# Altium PCB Receiver_1_5.PcbDoc
Units mm, origin at the board's own origin, x right, y up, seen from the top; angles counter-clockwise.
Board outline 173.49 x 80.89 mm, 2 copper layers (Top Layer, Bottom Layer), stack 1.571 mm thick; 36 components, 24 nets, 139 pads, 292 vias.
Unrouted connection lines stored in the file: 23.
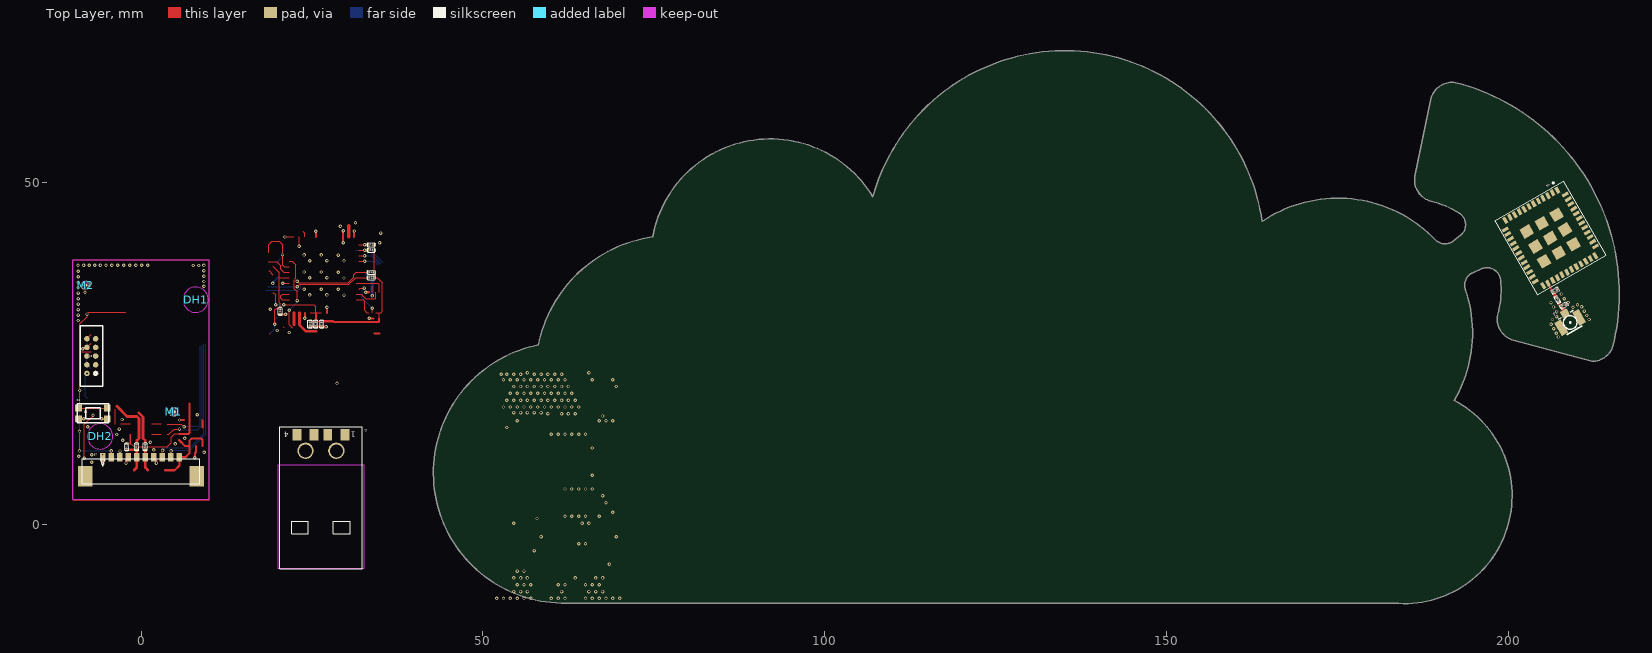
[diagram p0: Top Layer view]
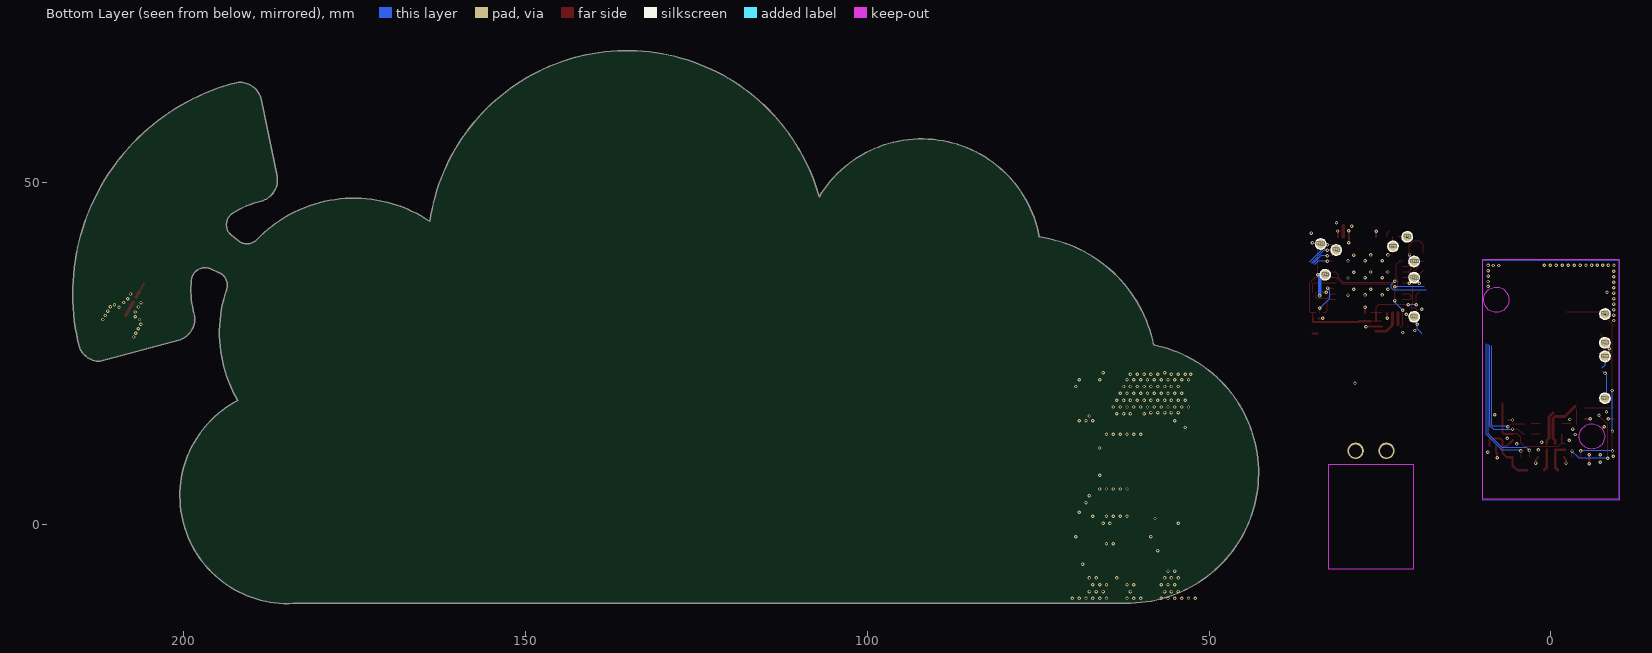
[diagram p1: Bottom Layer view, seen from below]

## Layer stack, top to bottom
Top Solder: solder mask 0.0102, Solder Resist, Dk 3.5
Top Layer: signal copper 0.0356
Dielectric 1: core 1.5, 2116, Dk 4.2
Bottom Layer: signal copper 0.0356
Bottom Solder: solder mask 0.0102, Solder Resist, Dk 3.5

## Board outline
61.459,-11.48 cw(c61.841,7.581) 58.129,26.281 cw(c77.684,22.342) 74.837,42.085 cw(c92.065,38.908) 107.067,47.956 cw(c135.164,40.182) 164.019,44.343 cw(c175.1,28.056) 189.321,41.687 ccw(c190.765,43.071) 192.01,41.505 193.025,42.313 ccw(c191.78,43.878) 192.859,45.563 ccw(c185.699,34.382) 188.717,47.311 cw(c189.537,50.437) 186.342,50.918 188.697,62.236 cw(c191.811,61.5) 192.298,64.663 cw(c184.432,33.81) 215.271,25.886 cw(c212.274,27.128) 212.274,23.884 200.776,26.984 cw(c201.626,30.099) 198.45,30.684 ccw(c185.699,34.382) 198.9,35.797 ccw(c196.911,35.584) 196.098,37.41 194.836,36.849 ccw(c195.65,35.022) 193.756,34.38 cw(c175.1,28.056) 192.128,18.153 cw(c184.83,4.192) 183.318,-11.489

## Design rules (kind name [scope] priority, off if disabled: settings)
BoardOutlineClearance [All] p1: gap=0.5 ignorepadtopadclearanceinfootprint=FALSE
Clearance Clearance_Fidu [IsPad AND (InComponent('M1') OR InComponent('M2')) vs IsArc] p1: gap=0.04 ignorepadtopadclearanceinfootprint=FALSE
Clearance Clearance_Polygon [InNamedPolygon('Top-GND') vs not (istrack and OnLayer('Keep-Out Layer'))] p2: gap=0.254 ignorepadtopadclearanceinfootprint=FALSE except(0: Arc-Hole Track-Hole SMDPad-Hole THPad-Hole Via-Hole Fill-Hole Poly-Hole Region-Hole Text-Hole)
Clearance Clearance_RF [All] p3: gap=0.125 ignorepadtopadclearanceinfootprint=FALSE
Clearance [All] p4: gap=0.125 ignorepadtopadclearanceinfootprint=FALSE
ComponentClearance [All] p1 off: gap=0.254 collisioncheckmode=3 verticalgap=0.254 showdistances=FALSE
DiffPairsRouting [All] p1: maxlimit=0.254 minlimit=0.165 mostfreqgap=0.165 toplayer_minwidth=0.4 toplayer_maxwidth=0.5 toplayer_prefwidth=0.5 bottomlayer_minwidth=0.4 bottomlayer_maxwidth=0.5 bottomlayer_prefwidth=0.5 maxuncoupledlength=12.7
Height [All] p1: minheight=0 maxheight=50 prefheight=12.7
HoleSize [All] p1: absolutevalues=TRUE maxlimit=5 minlimit=0.25 maxpercent=80.000 minpercent=20.000
HoleToHoleClearance [All] p1: gap=0.2 allowstackedmicrovias=TRUE
MinimumSolderMaskSliver [All] p1 off: minsoldermaskwidth=0.1
PolygonConnect Polygon_Via [isvia] p1: connectstyle=Direct reliefconductorwidth=0.254 reliefentries=4 polygonreliefangle="90 Angle" airgapwidth=0.254
PolygonConnect [All] p2: connectstyle=Direct reliefconductorwidth=0.254 reliefentries=4 polygonreliefangle="90 Angle" airgapwidth=0.254
RoutingVias [All] p1: holewidth=0.25 width=0.5 viastyle="Through Hole" minholewidth=0.25 minwidth=0.5 maxholewidth=0.8 maxwidth=1
SilkToSilkClearance [All] p1 off: silktosilkclearance=0.254
SilkToSolderMaskClearance SilkscreenOverComponentPads [IsPad] p1 off: minsilkscreentomaskgap=0.254 clearancetoexposedcopper=TRUE
SolderMaskExpansion [All] p1: expansion=0.1
Width Width_RF [InNetClass('RF')] p1: maxlimit=0.5 minlimit=0.2 preferedwidth=0.2 bottomlayer_maxwidth=0.2 minimp=50.000000 maximp=50.000000 favimp=50.000000
Width [All] p2: maxlimit=5 minlimit=0.125 preferedwidth=0.125 minimp=50.000000 maximp=50.000000 favimp=50.000000
22 further rules are at their usual default settings.

## Classes and differential pairs
net class RF: ANT NetC11_1
differential pair USB: +USB_P -USB_N
differential pair USB_R: +USB_R_P -USB_R_N

## Components (designator, comment, footprint, x,y, rotation, side; value= is the part's Value field where it differs from the comment)
C7 "10u" CAPC0402(1005)60_L 24.725,29.35 r90 top
C8 "1u" CAPC0402(1005)60_L 26.425,29.35 r90 top
C9 "100n" CAPC0402(1005)60_L 25.575,29.35 r90 top
C10 "" CAPC0402(1005)60_L 206.856,34.226 r30 top
C11 "" CAPC0402(1005)60_L 208.14,32.052 r30 top
DH1 "Drill hole M2.5_nonplated" "Drill hole M2.5_nonplated" 8,32.9 r0 top locked
DH2 "Drill hole M2.5_nonplated" "Drill hole M2.5_nonplated" -6,12.9 r0 top
J1 "629004113921" 629004113921 26.325,-6.45 r180 top
J2 "TC2050-IDC" TC2050-IDC-NL-10 -7.275,24.65 r90 top locked
J3 "0533981071" 0533981071 0,9.85 r0 top locked
J4 "U.FL-R-SMT-1" U.FL 209.084,29.566 r210 top
L1 "0R" L_0402_HF 207.181,32.913 r120 top
M1 "Fiducial Round" "Fiducial round_small" 4.8,16.5 r0 top
M2 "Fiducial Round" "Fiducial round_small" -8.075,35 r0 top
R2 "100k" RESC0402(1005)_L 33.675,40.929 r180 top
R3 "100k" RESC0402(1005)_L 33.675,40.129 r180 top
R4 "10k" RESC0402(1005)_L 20.375,31.2 r270 top
R8 "0R" RESC0402(1005)_L 0.625,11.4 r270 top
R9 "0R" RESC0402(1005)_L -0.625,11.4 r270 top
R11 "100k" RESC0402(1005)_L 33.675,36.925 r180 top
R12 "100k" RESC0402(1005)_L 33.675,36.125 r180 top
R13 "1k5" RESC0402(1005)_L -2.1,11.4 r270 top
S1 "KMR211GLFS" KMR211GLFS -7.05,16.275 r0 top
TP1 "Testpoint 1.5mm" "Testpoint SMD 1.5mm"#1 31.425,40.175 r180 bottom
TP2 "Testpoint 1.5mm" "Testpoint SMD 1.5mm"#2 21.025,42.1 r180 bottom
TP3 "Testpoint 1.5mm" "Testpoint SMD 1.5mm"#2 23.125,40.7 r180 bottom
TP4 "Testpoint 1.5mm" "Testpoint SMD 1.5mm"#2 33.025,36.55 r180 bottom
TP5 "Testpoint 1.5mm" "Testpoint SMD 1.5mm"#2 -7.9,30.8 r180 bottom
TP6 "Testpoint 1.5mm" "Testpoint SMD 1.5mm"#2 20.025,30.4 r180 bottom
TP7 "Testpoint 1.5mm" "Testpoint SMD 1.5mm"#2 -7.9,18.5 r180 bottom
TP8 "Testpoint 1.5mm" "Testpoint SMD 1.5mm"#2 -7.9,24.6 r180 bottom
TP9 "Testpoint 1.5mm" "Testpoint SMD 1.5mm"#2 -7.9,26.6 r180 bottom
TP10 "Testpoint 1.5mm" "Testpoint SMD 1.5mm"#2 20.025,38.5 r180 bottom
TP11 "Testpoint 1.5mm" "Testpoint SMD 1.5mm"#2 20.025,36.125 r180 bottom
TP12 "Testpoint 1.5mm" "Testpoint SMD 1.5mm"#2 33.7,41.05 r180 bottom
U6 "CMWX1ZZABZ-078" CMWX1ZZABZ 207.203,48.938 r300 top

## Footprints (in the part's own frame and the unit in brackets; to place one, negate y for a bottom-side part, rotate by r counter-clockwise, add the part's x,y. Pads: shape width x height; smd on the part's side, far side on the other; paste and mask are expansions set on the pad)
0533981071 [mm] "CONN HEADER 10POS 1.25MM VRT SMD"
  rect 2.1x3 smd: 0(-8.175,-2.75) 0(8.175,-2.75)
  rect 0.8x1.3 smd: 1(-5.625,0) 2(-4.375,0) 3(-3.125,0) 4(-1.875,0) 5(-0.625,0) 6(0.625,0) 7(1.875,0) 8(3.125,0) 9(4.375,0) 10(5.625,0)
  silkscreen extent -8.62,-3.9 8.62,-0.2, body extent -8.82,-3.85 8.82,0.35, height 4.71
629004113921 [mm] "4 pins"
  rect 1.3x1.7 smd: 1(-3.5,-19.6) 2(-1,-19.6) 3(1,-19.6) 4(3.5,-19.6)
  round 2.4 hole 1.9: Z1(-2.25,-17.25) Z2(2.25,-17.25)
  Keep-Out Layer board cut-out: -6.225,0 6.225,0 6.225,-15.2 -6.225,-15.2
  BoardOutline keep-out lines w0.127: 6.225,0 6.225,-15.2 -6.225,-15.2 -6.225,0 6.225,0
  silkscreen extent -6.02,-20.75 6.03,0, body extent -6.02,-19.8 6.03,0, height 1.86
CAPC0402(1005)60_L [mm] "Chip Capacitor, Body 1.0x0.5mm, Height 0.6mm, IPC High Density"
  rect 0.52x0.52 smd: 1(-0.4,0) 2(0.4,0)
  silkscreen extent -0.55,-0.3 0.55,0.3, body extent -0.55,-0.3 0.55,0.3, height 0.6
CMWX1ZZABZ [mm] "LoRa Module"
  rect 1x0.5 smd: 1(0,0) 2(0,-0.8) 3(0,-1.6) 4(0,-2.4) 5(0,-3.2) 6(0,-4) 7(0,-4.8) 8(0,-5.6) 9(0,-6.4) 10(0,-7.2) 11(0,-8) 12(0,-8.8) 25(11.1,-8.8) 26(11.1,-8) 27(11.1,-7.2) 28(11.1,-6.4) 29(11.1,-5.6) 30(11.1,-4.8) 31(11.1,-4) 32(11.1,-3.2) 33(11.1,-2.4) 34(11.1,-1.6) 35(11.1,-0.8) 36(11.1,0)
  rect 0.5x1 smd: 13(1.15,-9.5) 14(1.95,-9.5) 15(2.75,-9.5) 16(3.55,-9.5) 17(4.35,-9.5) 18(5.15,-9.5) 19(5.95,-9.5) 20(6.75,-9.5) 21(7.55,-9.5) 22(8.35,-9.5) 23(9.15,-9.5) 24(9.95,-9.5) 37(9.95,0.7) 38(9.15,0.7) 39(8.35,0.7) 40(7.55,0.7) 41(6.75,0.7) 42(5.95,0.7) 43(5.15,0.7) 44(4.35,0.7) 45(3.55,0.7) 46(2.75,0.7) 47(1.95,0.7) 48(1.15,0.7)
  rrect20% 1.6x1.6 smd: 49(3.05,-1.9)
  rect 1.6x1.6 smd: 50(5.55,-1.9) 51(8.05,-1.9) 52(3.05,-4.4) 53(5.55,-4.4) 54(8.05,-4.4) 55(3.025,-6.9) 56(5.55,-6.9) 57(8.05,-6.9)
  silkscreen extent -1.3,-10.2 11.8,1.4, body extent -0.7,-10.2 11.8,1.4, height 1.76
"Drill hole M2.5_nonplated" [mm] "Drill hole M2.5_nonplated"
  round 0 hole 2.7 unplated: 0(0,0)
  Keep-Out Layer circle w0.1: c0,0 r1.85
"Fiducial round_small" [mm] "0.5mm round fiducial"
  round 0.5 smd paste-1 mask+0.25: 0(0,0)
  Top Layer keep-out circle w0.1: c0,0 r0.35
  silkscreen extent -0.6,-0.6 0.6,0.6
KMR211GLFS [mm] "Microminiature SMT Top Actuated"
  rect 1x1 smd: 1(-2.1,0.8) 2(2.1,0.8) 3(-2.1,-0.8) 4(2.1,-0.8)
  silkscreen extent -2.3,-1.4 2.3,1.4, body extent -2.3,-1.4 2.3,1.4, height 1.9
L_0402_HF [mm] "Serie_LQW"
  rect 0.52x0.6 smd: 1(-0.4,0) 2(0.4,0)
  silkscreen extent -0.55,-0.25 0.55,0.25, body extent -0.55,-0.3 0.55,0.3, height 0.6
RESC0402(1005)_L [mm] "Chip Resistor, Body 1.0x0.5mm, IPC High Density"
  rect 0.45x0.55 smd: 1(-0.45,0) 2(0.45,0)
  silkscreen extent -0.53,-0.27 0.53,0.28, body extent -0.52,-0.27 0.53,0.28, height 0.4
TC2050-IDC-NL-10 [mm] "Tag Connect 2050 IDC, 10 Pins, no legs"
  round 0 hole 1 unplated: 0(-3.81,0) 0(3.81,-1.016) 0(3.81,1.016)
  round 0.8 smd paste-0.8: 1(-2.54,-0.635) 2(-1.27,-0.635) 3(0,-0.635) 4(1.265,-0.635) 5(2.535,-0.635) 6(2.535,0.635) 7(1.265,0.635) 8(0,0.635) 9(-1.27,0.635) 10(-2.54,0.635)
  silkscreen extent -4.44,-1.65 4.46,1.65, body extent -6.22,-3.37 6.22,3.37, height 29.28
"Testpoint SMD 1.5mm"#1 [mm] "SMD Testpoint, 1.5mm round"
  round 1.5 smd paste-1: 1(0,-0.075)
  silkscreen extent -0.75,-0.75 0.75,0.75
"Testpoint SMD 1.5mm"#2 [mm] "SMD Testpoint, 1.5mm round"
  round 1.5 smd paste-1: 1(0,0)
  silkscreen extent -0.75,-0.75 0.75,0.75
U.FL [mm] "U.FL Footprint designed for Hirose U.FL-R-SMT-1"
  rrect20% 1.1x1.1 smd: 1(0,-1.55)
  rrect20% 1.1x2.25 smd: 2(1.5,0) 3(-1.5,0)
  silkscreen extent -1.3,-1.3 1.3,1.3, body extent -1.3,-1.3 1.3,1.3, height 1.25

## Part data
C7 C8 C9: library part C_Chip_03, "Chip Capacitor", Properties="5%, 50V, X7R", SchLibComponentName=C_Chip
C10 C11: library part C_Chip-03, "Chip Capacitor", Manufacturer="Murata Electronics North America", Temperature Coefficient="C0G, NP0", Tolerance=±0.1pF, Voltage - Rated=50V, ComponentLink1Description=Datasheet, Supplier 1=Digi-Key
  C10: ComponentLink1URL=http://www.murata.com/~/media/webrenewal/support/library/catalog/products/capacitor/mlcc/c02e.ashx
  C11: Properties="50V, NPO"
DH1 DH2: library part "Drill hole M2.5_nonplated-01"
J1: library part 629004113921-01, "WR-COM USB Type A SMT with Clip", Manufacturer="Wurth Electronics Inc", Supplier Part Number 1=732-3182-5-ND, Category="Connectors, Interconnects", ComponentLink1Description=Datasheet, ComponentLink1URL=http://katalog.we-online.de/em/datasheet/629004113921.pdf, Connector Type="USB - A", Features="Board Lock, Shielded", Gender=Plug, Ingress Protection=-, Manufacturer Part Number=629004113921, Mounting Type="Surface Mount, Right Angle, Horizontal", Number of Contacts=4, Packaging=Tube, Pricing 1="1=2.25, 10=1.95, 50=1.8376, 100=1.65, 500=1.5 (USD)", RoHS="RoHS Compliant", SchLibComponentName=629004113921, Specifications=-, Stock 1=415, Supplier 1=Digi-Key, Supplier 2=Farnell, Supplier 3=Mouser, Supplier Part Number 2=2442732, Supplier Part Number 3=710-629004113921
J2: library part TDC2050-IDC-01, "TDC2050-IDC, 10Pins, dual footprint (leg and no-legs)", Manufacturer=Tag-Connect, ComponentLink1Description=Datasheet, ComponentLink1URL=http://www.tag-connect.com/Materials/TC2050-IDC%20Datasheet.pdf, Manufacturer Part Number=TC2050-IDC, SchLibComponentName=TC2050-IDC
J3: library part 0533981071-01, "CONN HEADER 10POS 1.25MM VRT SMD", Color=Natural, Manufacturer="Molex, LLC", Supplier Part Number 1=WM7614CT-ND, Category="Connectors, Interconnects", ComponentLink1Description=Datasheet, ComponentLink1URL=http://www.molex.com/pdm_docs/sd/533981071_sd.pdf, Connector Type="Header, Shrouded", Contact Finish=Tin, Contact Finish Thickness="39µin (1.00µm)", Contact Mating Length=-, Contact Type="Male Blade", Fastening Type="Detent Lock", Features="Solder Retention", Manufacturer Part Number=0533981071, Mounting Type="Surface Mount", Number of Positions=10, Number of Positions Loaded=All, Number of Rows=1, Packaging="Cut Tape (CT)", Part Status=Active, Pitch="0.049\" (1.25mm)", Pricing 1="1=1.74, 10=1.582, 25=1.4848, 50=1.4202, 100=1.3557, 250=1.22664, 500=1.12978 (USD)", RoHS="RoHS Compliant", Row Spacing=-, SchLibComponentName=0533981071, Stock 1=7748, Supplier 1=Digi-Key, Termination=Solder
J4: library part "COAX - U.FL-R-SMT-1", "Ultra Small Surface Mount Coaxial Connectors", Frequency - Max=6GHz, Manufacturer="Hirose Electric Co Ltd", Placetec Part Number=182-916100000000, Supplier Part Number 1=H11891CT-ND, Category="Connectors, Interconnects", ComponentLink1Description=http://www.hirose.co.jp/cataloge_hp/e32119372.pdf, ComponentLink1URL=http://www.hirose.co.jp/cataloge_hp/e32119372.pdf, Connector Style="Ultra Miniature Coaxial", Connector Type="Receptacle, Male Pins", Contact Termination=Solder, Fastening Type=Snap-On, Impedance="50 Ohm", Manufacturer Part Number=U.FL-R-SMT-1, Mounting Type="Surface Mount", Packaging="Cut Tape (CT)", RoHS="RoHS Compliant", Supplier 1=Digi-Key
L1: library part L_Chip_0402_HF-01, "Chip Inductor", Tolerance=±1%, Supplier 1=Digi-Key
M1 M2: library part "Fiducial Round-04", "Fiducial (Optical Marker)"
R2 R3 R4 R8 R9 R11 R12: library part R_Chip-05, "Chip Resistor", Properties=1%, SchLibComponentName=R_Chip
R13: library part R_Chip-02, "Chip Resistor", Properties=1%
S1: library part KMR211GLFS-01, "SWITCH TACTILE SPST-NO 0.05A 32V", Contact Rating @ Voltage="0.05A @ 32VDC", Illumination Type, Color=-, Manufacturer="C&K Components", Operating Force=120gf, Operating Temperature="-40°C ~ 85°C", Supplier Part Number 1=401-1426-1-ND, Actuator Height off PCB, from Pins=1.90mm, Actuator Material=-, Actuator Orientation="Top Actuated", Actuator Type=Standard, Category=Switches, Circuit=SPST-NO, ComponentLink1Description=http://www.ck-components.com/index.php?module=media&action=Display&cmpref=14414&lang=en&width=&height=&format=&alt=, ComponentLink1URL=http://www.ck-components.com/index.php?module=media&action=Display&cmpref=14414&lang=en&width=&height=&format=&alt=, Features="Grounding Pin", Illumination=Non-Illuminated, Illumination Voltage (Nominal)=-, Ingress Protection=-, Manufacturer Part Number=KMR211GLFS, Mechanical Life="200,000 Cycles", Mounting Type="Surface Mount", Outline="4.60mm x 2.80mm", Packaging="Cut Tape (CT)", Pricing 1="1=0.51, 10=0.493, 25=0.484, 50=0.4656, 100=0.4017, 250=0.3652, 500=0.34694, 1000=0.2739 (USD)", RoHS="RoHS Compliant", SchLibComponentName=KMR211GLFS, Stock 1=31963, Supplier 1=Digi-Key, Switch Function=Off-Mom, Switch Travel=0.20mm, Termination Style="Gull Wing"
TP1 TP2 TP3 TP4 TP5 TP6 TP7 TP8 TP9 TP10 TP11 TP12: library part "Testpoint SMD 1.5mm-02", "Testpoint SMD 1.5mm", SchLibComponentName="Testpoint 1.5mm"
U6: "LORA MODULE", Manufacturer="Murata Electronics North America", Supplier Part Number 1=490-16143-1-ND, ComponentLink1Description=Datasheet, ComponentLink1URL=http://wireless.murata.com/RFM/data/type_abz.pdf, Manufacturer Part Number=CMWX1ZZABZ-078, Supplier 1=Digikey

## Via types
v1: diameter 0.5, hole 0.25, Top Layer to Bottom Layer, tented both sides, 292 vias

## Nets (pads, with @x,y where several pads share a name; then routed paths per layer and width w, separated by ;. In a path a pad name is that pad's centre, name@x,y a point inside that pad or via, vN(x,y) a via of type N, cw(c..) or ccw(c..) an arc to the next point about the centre after c; other vN are vias at no path point)
\NRESET: J2.3 J3.2 S1.1 S1.2 TP5.1 U6.34 | length 42.3
  Top Layer w0.125: v1(-9,10.775) -9,13.603 v1@-8.978,13.625 ; -7.265,25.275 -8.95,25.275 -8.978,25.303 ; S1.2@-5.038,16.987 -9.062,16.987 S1.1 -8.978,17.247 v1(-8.978,19.622) -8.978,25.303 ; J3.2 v1(-4.375,10.775) ; -2.25,31.05 -7.65,31.05 v1(-7.9,30.8) -7.9,30.439 -8.978,29.361 -8.978,25.303 ; 18.66,37.175 19.285,36.55 ; 20.887,28.887 20.975,28.975 ; 23.675,42.95 23.975,42.65 23.975,42.075
  Bottom Layer w0.125: v1(-9,10.775) v1(-4.375,10.775) ; v1(-9,13.625) -8.978,13.647 v1(-8.978,19.622)
ANT: C10.1 L1.2 U6.26 | length 4
  Top Layer w0.2: U6.26 206.548,34.048 C10.1@206.561,34.025
  Top Layer w0.5: 30.375,42.075 30.375,43.7 ; C10.1@206.543,34.017 L1.2
BOOT: J2.4 J3.3 R4.1 TP6.1 U6.43 | length 27.4
  Top Layer w0.125: v1(-8.3,9.7) -8.3,14.675 v1@-7.025,15.95 ; J3.3 -3.075,9.9 v1(-3.075,10.75) ; 18.9,27.85 18.9,27.9 ; 19.285,37.815 20.225,36.875 20.225,36.1 ; v1(19.575,29.325) 19.575,31.4 19.825,31.65 R4.1 20.375,32.275 20.225,32.425 20.225,36.1 ; 21.675,36.125 20.25,36.125 20.225,36.1
  Bottom Layer w0.125: v1(-8.3,9.7) -4.125,9.7 v1(-3.075,10.75) ; 18.9,27.9 18.9,27.969 19.575,28.644 v1(19.575,29.325) 19.575,29.95 TP6.1
  other v1: -7.025,16
CSS: U6.17
DBG_RX: J2.9 R12.2 TP8.1 U6.18 | length 17.2
  Top Layer w0.125: v1@22.675,34.775 22.875,34.775 23.25,35.15 30.404,35.15 31.379,36.125 31.875,36.125 R12.2
  Bottom Layer w0.125: TP8.1 -7.91,24.59 -7.91,23.38 -7.405,22.875 ; 18.52,34.775 v1@22.675,34.775
  other v1: 28.675,20.65 22.85,34.775
DBG_TX: J2.10 R11.2 TP7.1 U6.19 | length 21.9
  Top Layer w0.125: v1(22.825,35.6) 23.025,35.4 30.3,35.4 31.112,36.213 31.112,36.541 31.496,36.925 31.875,36.925 R11.2
  Bottom Layer w0.125: TP7.1 -8.15,18.75 -8.15,21.87 v1(-7.91,22.11) -7.645,22.375 ; 18.28,34.275 23,34.275 23.35,34.625 23.35,35.075 v1(22.825,35.6)
GND: C7.1 C8.1 C9.1 C10.2 C11.2 J1.4 J1.Z1 J1.Z2 J2.2 J3.1 J3.4 J3.7 J4.2 J4.3 R4.2 S1.3 S1.4 TP11.1 U6.3 U6.7 U6.25 U6.27 U6.32 U6.44 U6.49 U6.50 U6.51 U6.52 U6.53 U6.54 U6.55 U6.56 U6.57 | length 15.6
  Top Layer w0.125: v1(20.725,35.3) 20.75,35.325 21.675,35.325
  Top Layer w0.3: S1.3 v1(-8.375,15.475) ; v1(-5.75,15.475) S1.4 ; J3.1 -5.6,9.825 v1(-5.6,8.9) ; v1(-2.2,9) -2.2,9.525 J3.4 ; J3.7 2.25,9.475 v1(2.25,9) ; R4.2 21.15,30.75 v1(21.175,30.775) ; v1@23.975,30.2 23.975,30.975 ; C7.1 C9.1 C8.1 v1@27.075,28.95 ; 25.575,42.075 v1(25.575,42.9) ; 27.175,30.975 v1@27.175,31.775 ; v1(29.575,41.25) 29.575,42.075 v1(29.575,42.975) ; 31.175,42.075 v1(31.175,42.95) ; 34.15,27.95 34.9,27.95
  Bottom Layer w0.3: v1(19.285,35.28) 19.285,35.385 TP11.1 ; v1(29.575,42.975) cw(c29.6,42.975) v1@29.6,43
  other v1: 52.025,-10.8 53.025,-10.8 54.025,-10.8 55.025,-10.8 56.025,-10.8 57.025,-10.8 60.025,-10.8 61.025,-10.8 62.025,-10.8 65.025,-10.8 66.025,-10.8 67.025,-10.8 68.025,-10.8 69.025,-10.8 70.025,-10.8 54.525,-9.8 55.525,-9.8 56.525,-9.8 61.525,-9.8 65.525,-9.8 66.525,-9.8 67.525,-9.8 55.025,-8.8 56.025,-8.8 57.025,-8.8 61.025,-8.8 62.025,-8.8 65.025,-8.8 66.025,-8.8 67.025,-8.8 54.525,-7.8 55.525,-7.8 56.525,-7.8 63.525,-7.8 66.525,-7.8 67.525,-7.8 55.025,-6.8 56.025,-6.8 68.525,-5.8 57.525,-3.8 64.025,-2.8 65.025,-2.8 58.525,-1.8 69.525,-1.8 54.525,0.2 64.525,0.2 65.525,0.2 57.925,0.888 62.025,1.2 63.025,1.2 64.025,1.2 65.025,1.2 67.025,1.2 69.025,1.813 68.025,3.2 67.525,4.2 62.025,5.2 63.025,5.2 64.025,5.2 65.025,5.2 66.025,5.2 66.025,7.2 -7.2,9.1 -9.1,10 -7.2,10.2 -5.6,10.2 9.225,10.6 1.85,10.925 66.025,11.2 5,11.8 1.375,12.05 -2.675,12.35 6.4,12.6 -3.534,13.175 60.025,13.2 61.025,13.2 62.025,13.2 63.025,13.2 64.025,13.2 65.025,13.2 -3.2,13.975 53.525,14.2 -7.8,14.3 55.025,15.2 67.025,15.2 68.025,15.2 69.025,15.2 -2.775,15.375 67.525,15.888 8.225,16.05 59.525,16.2 61.525,16.2 62.525,16.2 63.525,16.2 54.525,16.388 55.525,16.388 56.525,16.388 57.525,16.388 58.525,16.388 -8.125,16.5 53.025,17.2 54.025,17.2 55.025,17.2 56.025,17.2 57.025,17.2 58.025,17.2 59.025,17.2 60.025,17.2 61.025,17.2 62.025,17.2 63.025,17.2 64.025,17.2 53.525,18.2 54.525,18.2 55.525,18.2 56.525,18.2 57.525,18.2 58.525,18.2 59.525,18.2 60.525,18.2 61.525,18.2 62.525,18.2 63.525,18.2 54.025,19.2 55.025,19.2 56.025,19.2 57.025,19.2 58.025,19.2 59.025,19.2 60.025,19.2 61.025,19.2 62.025,19.2 63.025,19.2 54.525,20.2 55.525,20.2 56.525,20.2 57.525,20.2 58.525,20.2 59.525,20.2 60.525,20.2 61.525,20.2 62.525,20.2 69.525,20.2 53.025,21.2 54.025,21.2 55.025,21.2 56.025,21.2 57.025,21.2 58.025,21.2 59.025,21.2 60.025,21.2 61.025,21.2 62.025,21.2 66.025,21.2 69.025,21.2 52.7,21.988 53.525,21.988 54.525,21.988 55.525,21.988 57.525,21.988 58.525,21.988 59.525,21.988 60.525,21.988 61.525,21.988 56.525,22.2 65.525,22.2 207.363,27.446 207.038,28.009 21.67,28.1 19.95,28.4 206.663,28.659 27.075,28.925 206.288,29.308 -9.2,29.852 206.493,30.004 211.844,30.005 23.95,30.2 207.117,30.422 211.507,30.589 -9.2,30.655 207.099,31.104 211.123,31.234 -9.2,31.457 18.9,31.5 27.2,31.775 209.499,31.797 206.649,31.826 210.748,31.883 210.149,32.172 -9.2,32.26 206.274,32.476 208.808,32.495 -9.2,33.062 208.204,33.041 29.7,33.575 24.7,33.6 27.2,33.6 207.804,33.734 -9.2,33.865 -8.2,34 28.85,34.425 23.85,34.45 26.35,34.45 -9.2,34.667 9.2,34.85 -9.2,35.47 9.2,35.561 29.7,36.075 24.7,36.1 27.2,36.1 -9.2,36.272 9.2,36.346 28.85,36.925 23.85,36.95 26.35,36.95 -9.2,37.075 9.2,37.132 7.661,37.9 8.446,37.9 -9.225,37.925 -8.403,37.925 -7.581,37.925 -6.759,37.925 -5.937,37.925 -5.125,37.925 -4.255,37.925 -3.385,37.925 -2.515,37.925 -1.645,37.925 -0.745,37.925 0.125,37.925 0.995,37.925 9.2,37.918 24.7,38.6 27.2,38.6 29.7,38.575 28.85,39.425 23.85,39.45 26.35,39.45 34.903,41.25 35.05,42.65 29.175,43.65 31.379,44.15
MISO: U6.15
MOSI: U6.14
NetC11_1: C11.1 J4.1 L1.1 | length 2.3
  Top Layer w0.5: L1.1 C11.1 208.331,30.921 J4.1@208.506,30.618
NetTP2_1: TP2.1 U6.36 | length 1.4
  Top Layer w0.125: v1(21.05,42.075) 22.375,42.075
  Bottom Layer w0.125: TP2.1 v1(21.05,42.075)
NetTP3_1: TP3.1 U6.35 | length 1.4
  Top Layer w0.125: v1(23.125,40.7) 23.175,40.75 23.175,42.075
NetU6_46: U6.46 U6.47 | length 3
  Top Layer w0.125: 21.675,32.925 20.675,32.925 20.475,33.125 20.475,33.5 20.7,33.725 21.675,33.725
SCK: U6.16
SWCLK: J2.7 TP9.1 U6.42 | length 6.6
  Top Layer w0.125: v1(-8.525,25.726) -8.337,25.915 J2.7 -7.3,26.525 ; 18.625,38.425 19.85,38.425 20.425,37.85 20.425,37.375 20.875,36.925 21.675,36.925
  Bottom Layer w0.125: v1(-8.525,25.726) -7.9,26.352 TP9.1
SWDIO: J2.6 TP10.1 U6.41 | length 9.9
  Top Layer w0.125: J2.6 -7.25,27.845 ; 18.675,39.745 18.675,40.975 19.15,41.45 20.2,41.45 20.7,40.95 20.7,37.975 20.95,37.725 21.675,37.725
  Bottom Layer w0.125: TP10.1 20.7,39.175 v1(20.7,39.5)
UART2_RX: J3.8 R3.2 TP1.1 U6.23 | length 26.9
  Top Layer w0.125: J3.8 3.125,10.825 v1(3.15,10.85) ; 31.875,40.125 31.879,40.129 v1(32.7,40.129) R3.2
  Bottom Layer w0.125: v1(3.15,10.85) 3.513,11.213 7.109,11.213 9.183,13.286 9.183,26.35 ; TP1.1 31.454,40.129 v1(32.7,40.129) 33.228,40.129 35.108,38.25
UART2_TX: J3.9 R2.2 TP12.1 U6.24 | length 25.4
  Top Layer w0.125: J3.9 v1@4.375,10.7 ; v1@4.376,10.701 v1@4.4,10.701 ; 31.875,40.925 v1(32.7,40.925) 33.221,40.925 R2.2
  Bottom Layer w0.125: v1@4.4,10.701 4.6,10.9 7.15,10.9 9.433,13.183 9.433,26.453 ; v1@32.75,40.975 v1(32.7,40.925) 32.786,40.925 35.358,38.353
  other v1: 4.4,10.776
USB_N: R8.1 U6.2 | length 9.5
  Top Layer w0.4: -0.343,16.375 0.282,15.75 0.282,12.617 0.625,12.275 R8.1 ; 23.175,30.975 23.175,29.225 24.125,28.275 25.582,28.275
USB_P: R9.1 U6.1 | length 9.6
  Top Layer w0.4: -3.55,17.326 -2.034,15.81 -0.577,15.81 -0.283,15.516 -0.283,12.617 -0.625,12.275 R9.1 ; 22.375,29.226 22.375,30.975
USB_R_N: J1.2 J3.6 R8.2 | length 3.2
  Top Layer w0.4: R8.2 J3.6 0.625,8.325 1,7.95
USB_R_P: J1.3 J3.5 R9.2 R13.2 | length 4.6
  Top Layer w0.4: R13.2 R9.2 J3.5 -0.625,8.325 -1,7.95
VCC: C7.2 C8.2 C9.2 J2.1 R2.1 R3.1 R11.1 R12.1 R13.1 TP4.1 U6.4 U6.5 U6.6 U6.48 | length 56
  Top Layer w0.125: 33.825,33.99 33.825,34.775 33.925,34.875 ; 34.325,31.01 34.825,31.01 34.825,30.15
  Top Layer w0.15: R13.1 -1.625,11.85 ; -1.6,13.175 -1.55,13.225 ; -1.55,11.925 -1.625,11.85 ; -1.287,11.662 -1.475,11.85 -1.625,11.85 ; 19.285,34.01 19.7,33.595 v1(19.7,32.175) ; v1@20.925,32.176 21.624,32.176 21.675,32.125 25.3,32.125 25.575,31.85 25.575,30.975 ; C7.2 C9.2 C8.2 ; 24.775,30.975 25.575,30.975 ; 26.375,30.975 25.575,30.975 ; R12.1 34.55,36.125 35.3,35.375 35.3,31.175 35.135,31.01 34.825,31.01 ; v1(34.125,36.55) R11.1 R3.1 R2.1
  Top Layer w0.175: -1.287,11.662 -1.025,11.4 3.825,11.4 4.425,12 4.425,12.75 4.95,13.275 5.55,13.275
  Top Layer w0.2: -1.55,11.925 -1.55,13.225
  Top Layer w0.3: 5.55,13.275 6.925,13.275 7.075,13.425 7.075,17.715 ; C9.2 25.575,30.975 ; C8.2 28.09,29.75 28.225,29.615 34.74,29.615 34.825,29.7 34.825,30.15
  Bottom Layer w0.15: v1(19.7,32.175) 20.924,32.175 v1@20.925,32.176
  Bottom Layer w0.5: TP4.1 v1(34.125,36.55) 33.825,36.25 v1(33.825,33.45)
  other v1: 20.875,32.176
VIN: J1.1 J3.10 | length 12.1
  Top Layer w0.3: 3.5,7.95 4.925,7.95 5.625,8.65 J3.10 6.5,9.85 7.075,10.425 7.075,11.475 ; 5.55,12.375 6.45,11.475 7.075,11.475 ; 8.975,11.475 8.975,12.425 8.8,12.6 7.4,12.6 7.075,12.275 7.075,11.475
pads on no net: DH1.0 DH2.0 J2.0 J2.5 J2.8 J3.0 M1.0 M2.0 U6.8 U6.9 U6.10 U6.11 U6.12 U6.13 U6.20 U6.21 U6.22 U6.28 U6.29 U6.30 U6.31 U6.33 U6.37 U6.38 U6.39 U6.40 U6.45
copper on no net: | length 80.1
  Top Layer w0.125: -3.8,14.7 -3.8,16.9 ; -2.9,14.7 -2.875,14.725 -1.55,14.725 ; 1.55,13.225 2.875,13.225 2.9,13.2 ; 1.55,14.725 2.875,14.725 2.9,14.7 ; 3.8,13.2 4.075,13.2 4.85,13.975 v1(5.625,13.975) ; 3.8,14.7 5.9,14.7 v1(6.3,14.3) ; 21.675,38.525 22.125,38.525 22.65,38 22.65,36.044 22.387,35.781 22.387,34.538 22.85,34.075 v1(22.85,32.775) ; v1(21.7,31.375) 21.7,29.225 22.125,28.8 ; 31.475,32.925 32.475,32.925 32.7,32.7 32.7,31.325 33.015,31.01 33.325,31.01 ; 31.488,35.338 31.888,35.338 ; 31.5,33.7 31.9,33.7 ; 31.875,33.725 31.9,33.7 ; 31.875,34.525 31.85,34.5 31.925,34.425 32.101,34.601 v1(32.675,34.601) ; 31.875,35.325 31.888,35.338 ; 31.875,38.525 31.879,38.529 v1(32.7,38.529) ; 31.875,39.325 v1(32.7,39.325) ; 33.825,31.01 v1(33.825,31.65) ; 34.325,33.99 34.325,33.1 34.237,33.012 32.888,33.012 32.2,33.7 31.9,33.7 ; 34.825,33.99 34.825,34.875 34.825,35.2 34.687,35.338 31.888,35.338
  Top Layer w0.3: v1@5.625,15.275 6.275,15.275 ; v1(7.85,9.775) 7.875,9.775 7.875,10.425 8.025,10.575 8.025,11.475 ; 8.975,14.225 8.975,15.25 ; v1@33.09,33.99 33.325,33.99 ; v1@33.375,30.15 34.025,30.15
  Bottom Layer w0.125: v1(5.625,13.975) 5.738,13.862 8.291,13.862 8.933,14.504 8.933,26.246 ; v1(6.3,14.3) 6.375,14.375 8.45,14.375 8.683,14.608 8.683,26.142 ; v1(21.7,31.375) 22.85,32.525 v1(22.85,32.775) ; v1(32.675,34.601) 32.337,34.263 32.337,33.138 v1(33.825,31.65) ; v1(32.7,38.529) 34.121,38.529 34.608,38.042 ; v1(32.7,39.325) 33.679,39.325 34.858,38.146
  other v1: 5.625,15.3 33.375,30.175 32.875,33.975

## Polygon pours and split planes (outlines as drawn)
GND on Bottom Layer "GND_L02_P001" (solid, remove dead copper, shelved, pour order 1): -10,3.55 10,3.55 10,38.7 -10,38.7
GND on Top Layer "GND_L01_P000" (solid, remove dead copper, shelved, pour order 0): -10,3.55 10,3.55 10,38.7 -10,38.7

## Keep-outs
Keep-Out Layer:
  lines w0.01: -10,3.7 10,3.7 10,38.725 -10,38.725 -10,3.7

## Silkscreen, mask and mechanical layers (free items; w line width, h text height)
Bottom Solder:
  text ".PCBName" at 1.925,14.462 h0.6
  text "Rev .BoardRevision" at 1.925,13.587 h0.6
  text "'.ProjectNumberMiromico'" at 1.925,12.712 h0.6
BoardOutline:
  the board outline again, w0.002
LayerStack:
  drawing of 191 lines, arcs and shapes, not listed
  text "Layer" at -48.248,80.006 h1.52
  text "Name" at -37.836,80.006 h1.52
  text "Material" at -14.22,80.006 h1.52
  text "Thickness" at 7.618,80.006 h1.52
  text "Constant" at 24.124,80.006 h1.52
  text "Board Layer Stack" at 38.598,80.006 h1.52
  text "1" at -48.248,76.958 h1.52
  text "Top Overlay" at -37.836,76.958 h1.52
  text "2" at -48.248,73.91 h1.52
  text "Top Solder" at -37.836,73.91 h1.52
  text "Solder Resist" at -14.22,73.91 h1.52
  text "0.010mm" at 7.618,73.91 h1.52
  text "3.5" at 24.124,73.91 h1.52
  text "3" at -48.248,70.862 h1.52
  text "Top Layer" at -37.836,70.862 h1.52
  text "Copper" at -14.22,70.862 h1.52
  text "0.036mm" at 7.618,70.862 h1.52
  text "4" at -48.248,67.814 h1.52
  text "Dielectric 1" at -37.836,67.814 h1.52
  text "2116" at -14.22,67.814 h1.52
  text "1.500mm" at 7.618,67.814 h1.52
  text "4.2" at 24.124,67.814 h1.52
  text "5" at -48.248,64.766 h1.52
  text "Bottom Layer" at -37.836,64.766 h1.52
  text "Copper" at -14.22,64.766 h1.52
  text "0.036mm" at 7.618,64.766 h1.52
  text "6" at -48.248,61.718 h1.52
  text "Bottom Solder" at -37.836,61.718 h1.52
  text "Solder Resist" at -14.22,61.718 h1.52
  text "0.010mm" at 7.618,61.718 h1.52
  text "3.5" at 24.124,61.718 h1.52
  text "7" at -48.248,58.67 h1.52
  text "Bottom Overlay" at -37.836,58.67 h1.52
TopHeader:
  lines w0.1: -16.175,-30.213 -4.175,-30.213 ; -16.175,-28.213 19.825,-28.213 ; -16.175,-26.213 19.825,-26.213 ; -4.175,-28.213 -4.175,-30.213 ; 7.825,-28.213 7.825,-30.213 ; 19.825,-30.213 7.825,-30.213 ; 19.825,-24.213 -16.175,-24.213 ; -16.175,-32.213 -16.175,-24.213 ; -16.175,-32.213 19.825,-32.213 ; -16.175,-32.213 -16.175,-35.513 19.825,-35.513 19.825,-32.213 ; -16.175,-24.213 -16.175,-21.413 19.825,-21.413 19.825,-24.713 19.825,-32.213 ; -4.175,-30.213 7.825,-30.213
  text ".Printout_Name" at -15.675,-23.513 h2
  text "PCB Name:" at -15.675,-25.713 h1.6
  text ".PCBName" at -7.975,-25.713 h1.6
  text "Customer:" at -15.675,-27.713 h1.6
  text ".Customer" at -8.875,-27.713 h1.6
  text "Author:" at -15.675,-29.713 h1.6
  text ".AuthorMiromico" at -10.775,-29.713 h1.6
  text "Project:" at -3.675,-29.713 h1.6
  text ".ProjectNumberMiromico" at 1.325,-29.713 h1.6
  text "Revision:" at 8.325,-29.713 h1.6
  text ".BoardRevision" at 14.325,-29.713 h1.6
  text "Date:" at -15.675,-31.713 h1.6
  text ".Print_Date" at -12.175,-31.713 h1.6
  text "Time:" at -3.675,-31.713 h1.6
  text ".Print_Time" at 0.125,-31.713 h1.6
  text "Miromico AG" at 4.025,-34.813 h3
BottomHeader:
  lines w0.1: -16.175,-30.213 -4.175,-30.213 ; -16.175,-28.213 19.825,-28.213 ; -16.175,-26.213 19.825,-26.213 ; -16.175,-24.213 19.825,-24.213 ; -4.175,-28.213 -4.175,-30.213 ; 7.825,-28.213 7.825,-30.213 ; 19.825,-30.213 7.825,-30.213 ; -16.175,-32.213 -16.175,-35.513 19.825,-35.513 19.825,-32.213 ; -16.175,-32.213 -16.175,-24.713 -16.175,-21.413 19.825,-21.413 19.825,-24.213 ; -16.175,-32.213 19.825,-32.213 ; -4.175,-30.213 7.825,-30.213 ; 19.825,-32.213 19.825,-24.213
  text ".Printout_Name" at 19.325,-23.513 h2
  text ".PCBName" at 11.625,-25.713 h1.6
  text "PCB Name:" at 19.325,-25.713 h1.6
  text ".Customer" at 12.525,-27.713 h1.6
  text "Customer:" at 19.325,-27.713 h1.6
  text ".BoardRevision" at -10.675,-29.713 h1.6
  text "Revision:" at -4.675,-29.713 h1.6
  text ".ProjectNumberMiromico" at 2.325,-29.713 h1.6
  text "Project:" at 7.325,-29.713 h1.6
  text ".AuthorMiromico" at 14.425,-29.713 h1.6
  text "Author:" at 19.325,-29.713 h1.6
  text ".Print_Time" at 3.525,-31.713 h1.6
  text "Time:" at 7.325,-31.713 h1.6
  text ".Print_Date" at 15.825,-31.713 h1.6
  text "Date:" at 19.325,-31.713 h1.6
  text "Miromico AG" at -0.375,-34.813 h3

## Text inside footprints (layer, text, board x,y; h text height)
J1: Top Overlay "4" at 21.635,13.585 h0.8 r180; Top Overlay "1" at 31.445,13.585 h0.8 r180; BoardOutline "Milling Area" at 29.675,4.225 h1.52 r180